# Altium PCB 105848.PcbDoc
Units mil, origin at the board's own origin, x right, y up, seen from the top; angles counter-clockwise.
Board outline 6500 x 5700 mil, 2 copper layers (Top Layer, Bottom Layer); 58 components, 65 nets, 285 pads, 65 vias.
Unrouted connection lines stored in the file: 59.
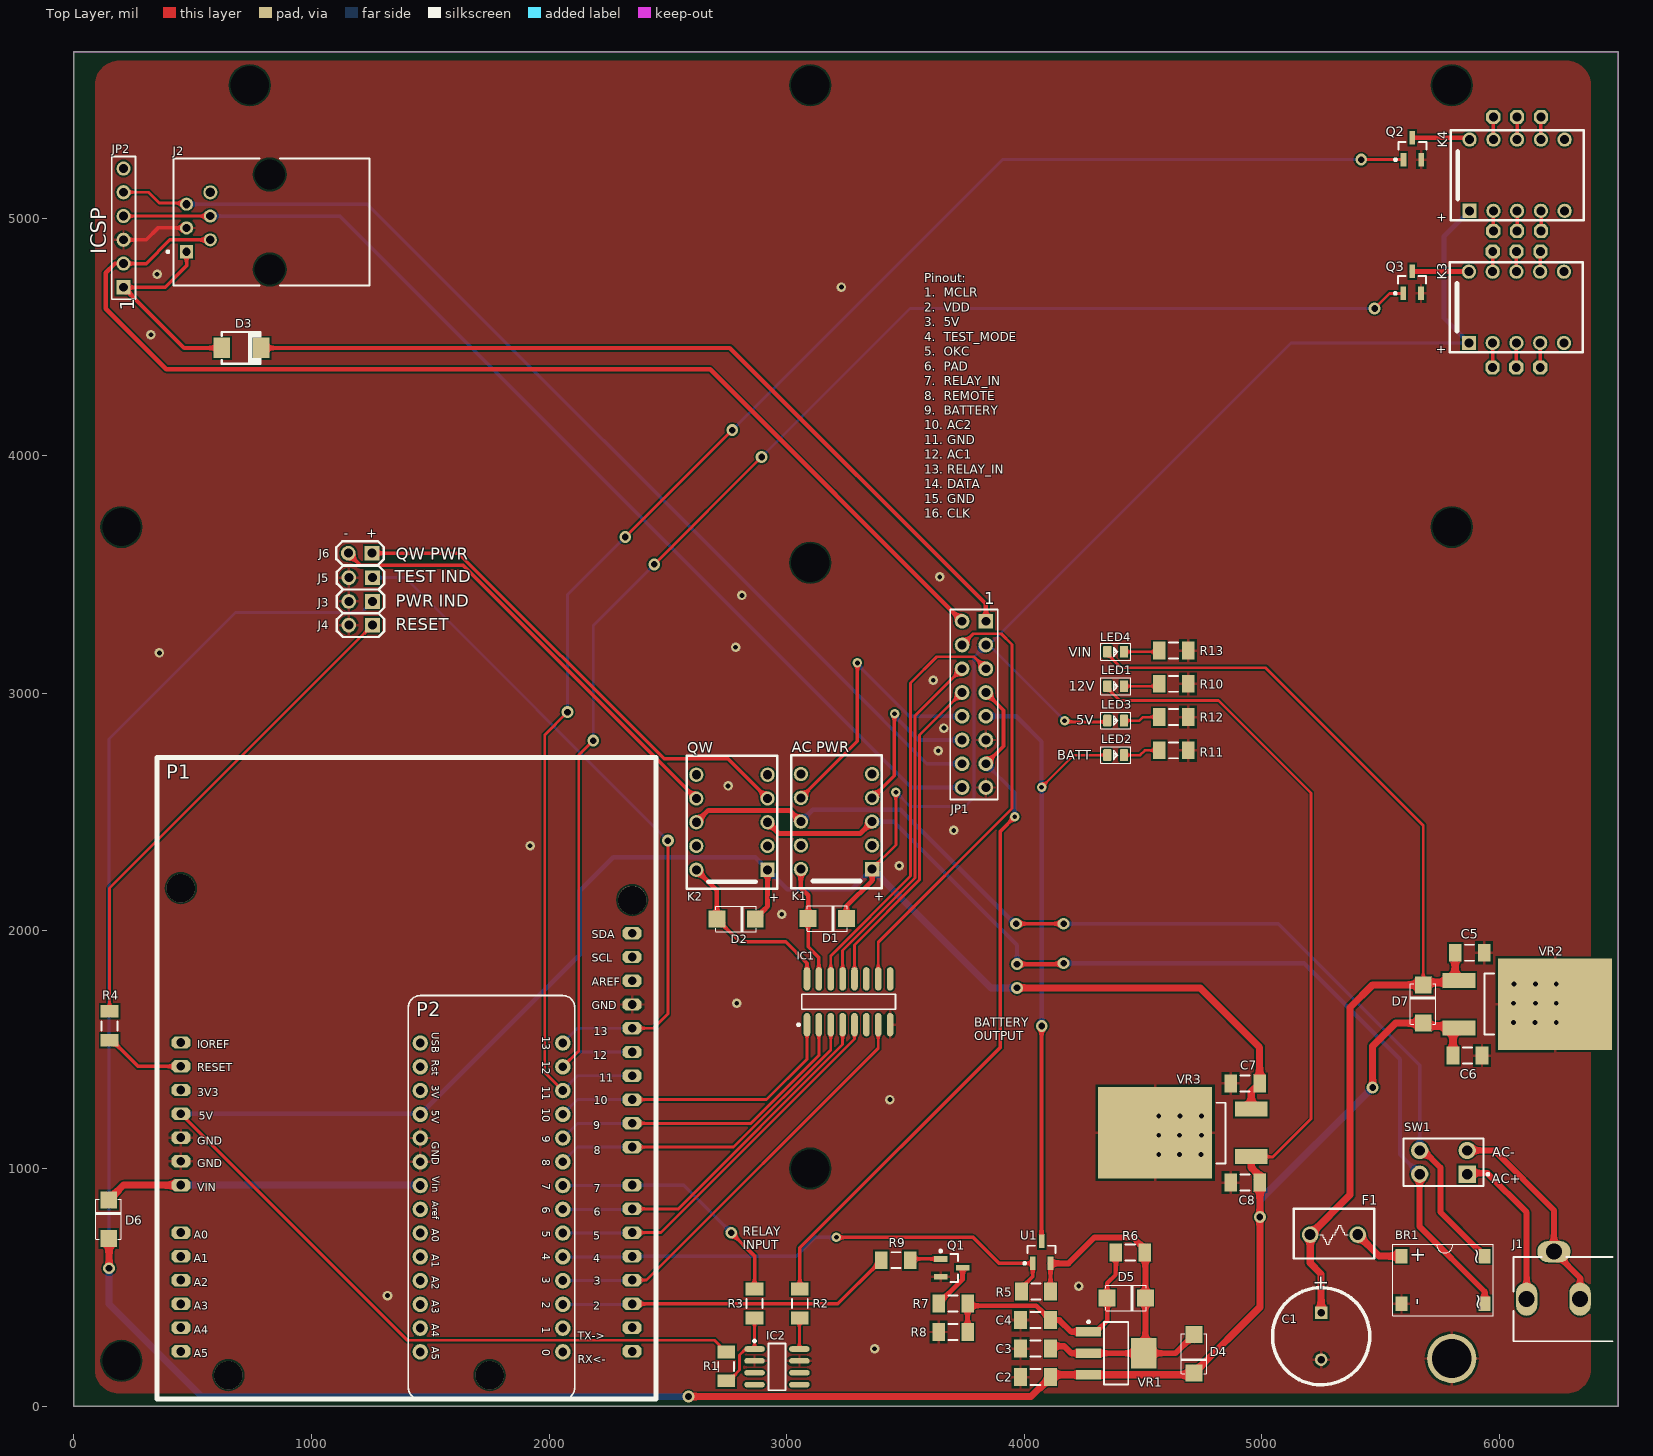
[diagram p0: Top Layer view]
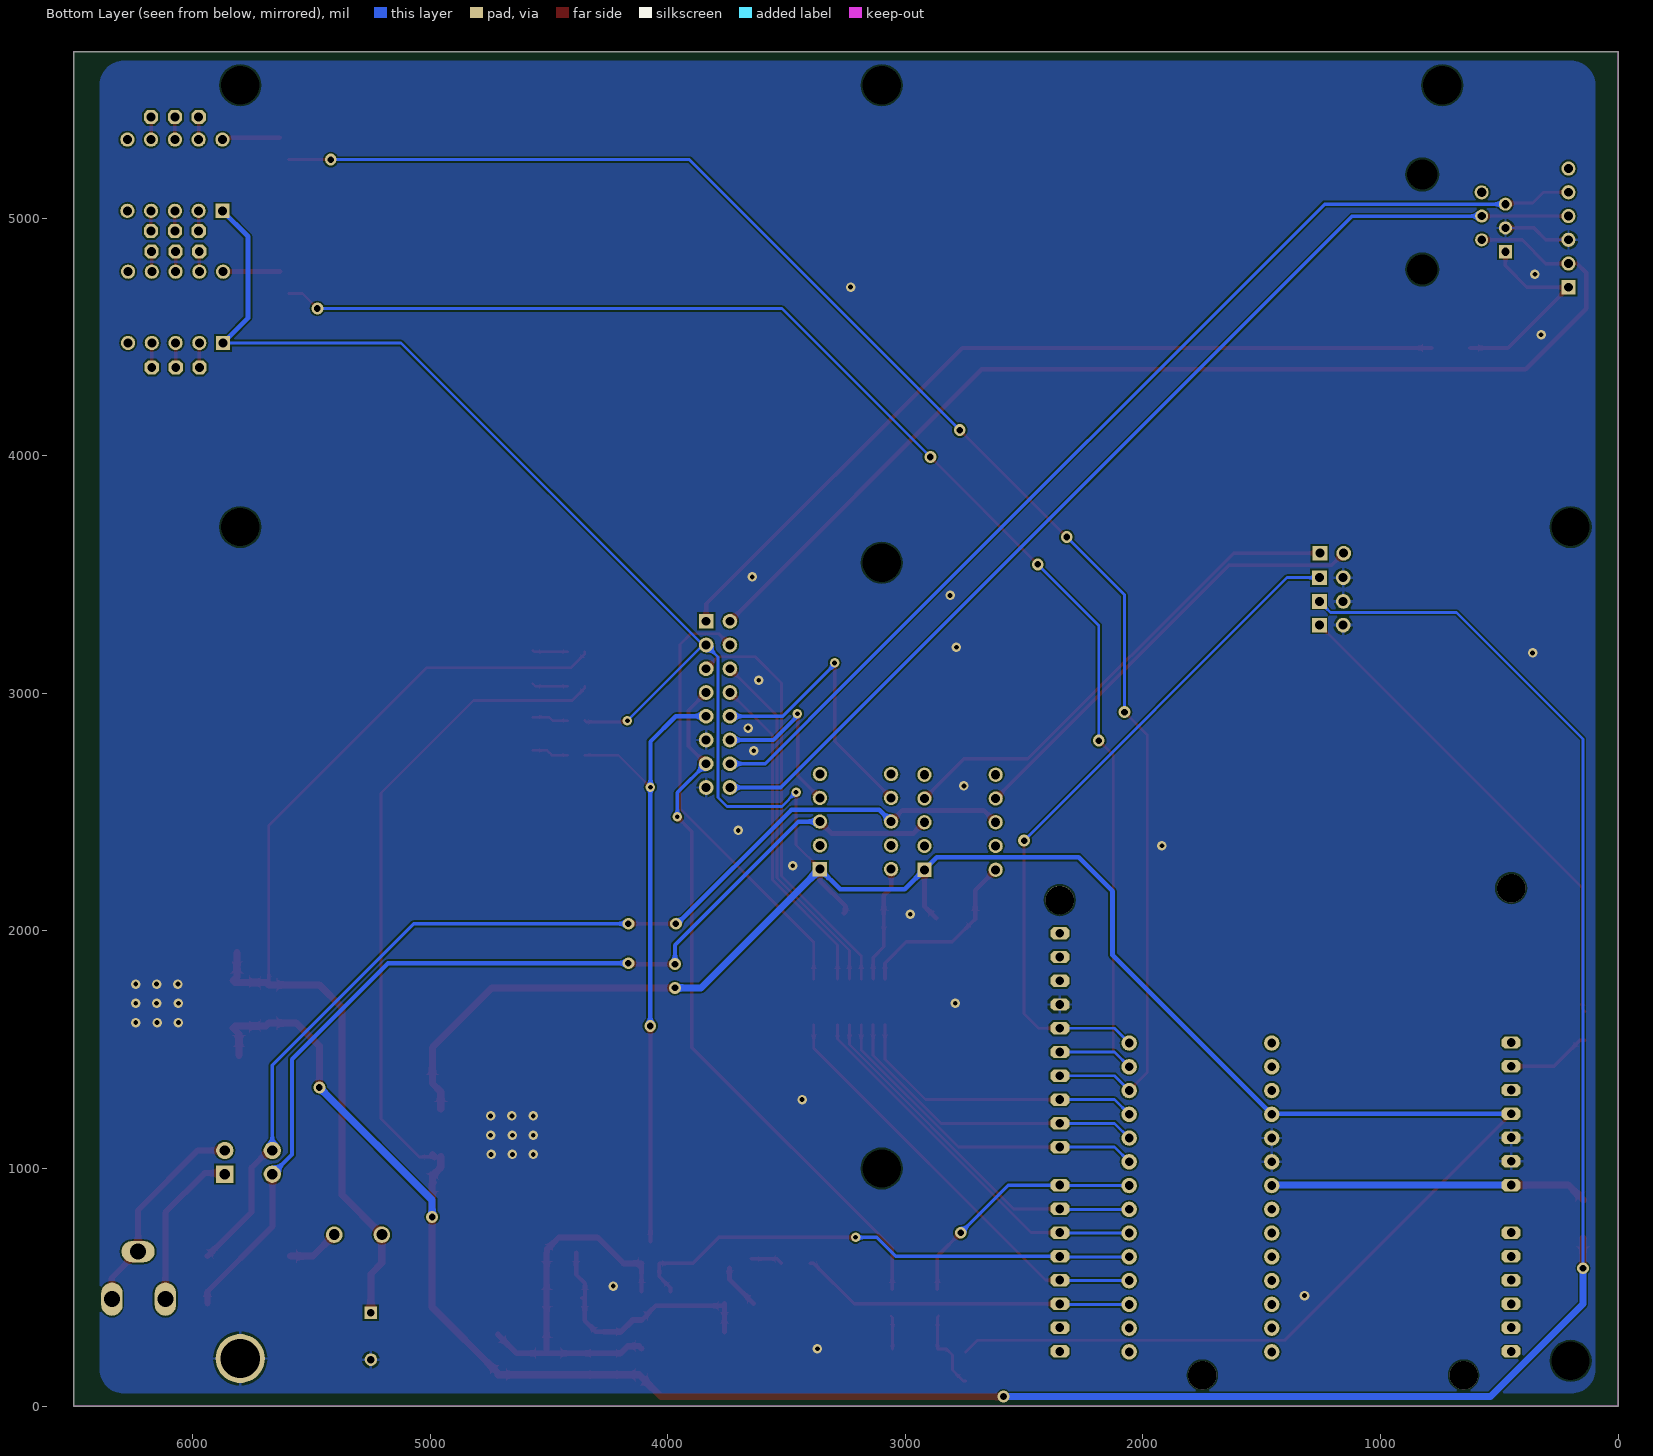
[diagram p1: Bottom Layer view, seen from below]

## Layer stack, top to bottom
Top Solder: solder mask 0.4, Solder Resist, Dk 3.5
Top Layer: signal copper 1.4
Dielectric 1: dielectric 12.6, FR-4, Dk 4.8
Bottom Layer: signal copper 1.4
Bottom Solder: solder mask 0.4, Solder Resist, Dk 3.5

## Board outline
0,0 6500,0 6500,5700 0,5700

## Design rules (kind name [scope] priority, off if disabled: settings)
BoardOutlineClearance [All] p1: gap=10 ignorepadtopadclearanceinfootprint=FALSE
Clearance [All] p1: gap=7 ignorepadtopadclearanceinfootprint=FALSE
Height [All] p1 off: minheight=0 maxheight=1000 prefheight=500
HoleSize [All] p1: absolutevalues=TRUE maxlimit=260 minlimit=10 maxpercent=80.000 minpercent=20.000
HoleToHoleClearance [All] p1: gap=7 allowstackedmicrovias=TRUE
LayerPairs [All] p1 off: enforce=TRUE
MinimumAnnularRing [All] p1: minimumring=5
MinimumSolderMaskSliver [All] p1: minsoldermaskwidth=7
PlaneClearance [All] p1: clearance=10
PolygonConnect PolygonConnect_Via [All vs IsVia] p1: connectstyle=Direct reliefconductorwidth=12 reliefentries=4 polygonreliefangle="90 Angle" airgapwidth=10
PolygonConnect [All] p2: connectstyle=Relief reliefconductorwidth=12 reliefentries=4 polygonreliefangle="90 Angle" airgapwidth=10
RoutingVias [All] p1: holewidth=20 width=40 viastyle="Through Hole" minholewidth=18 minwidth=30 maxholewidth=28 maxwidth=50
SilkToSilkClearance [All] p1 off: silktosilkclearance=10
SilkToSolderMaskClearance [IsPad] p1 off: minsilkscreentomaskgap=10 clearancetoexposedcopper=TRUE
SolderMaskExpansion [All] p1: expansion=2
UnRoutedNet [All] p1: checkbadconnections=TRUE
Width [All] p1: maxlimit=500 minlimit=7 preferedwidth=12
21 further rules are at their usual default settings.

## Components (designator, comment, footprint, x,y, rotation, side; value= is the part's Value field where it differs from the comment)
BR1 "BRIDGE_1A_SMT" BRIDGE_1A_SMT 5588,631 r90 top
C1 "Cap" CAPR5-4X5 5250,293.57 r270 top value=220uF
C2 "Cap" CAPC1206(3216)110_M 4047.76,121.68 r180 top value=0.1uF
C3 "Cap" CAPC1206(3216)110_M 4047.76,241.68 r180 top value=1uF
C4 "Cap" CAPC1206(3216)110_M 4047.76,361.68 r0 top value=1uF
C5 "Cap" RESC1206(3216)_M 5875,1908 r0 top value=0.33uF
C6 "Cap" RESC1206(3216)_M 5866,1475 r0 top value=0.1uF
C7 "Cap" RESC1206(3216)_M 4930,1358 r180 top value=0.1uF
C8 "Cap" RESC1206(3216)_M 4930,940.46 r180 top value=0.33uF
D1 "Diode 1N5400" DO-214AC 3171,2052 r0 top
D2 "Diode 1N5400" DO-214AC 2787,2050 r0 top
D3 "SS12" SMB_2 622.86,4454 r0 top
D4 "1N4002" DO-214AC 4715,220 r270 top
D5 "1N4002" DO-214AC 4429,455 r0 top
D6 "1N4002" DO-214AC 146,786 r90 top
D7 "1N4002" DO-214AC 5680,1692 r90 top
F1 "1A" FUSE_200 5404,721.17 r180 top
IC1 "ULN2003A" SO-16_M 3260.75,1701.68 r90 top locked
IC2 "ILD207" SO8_N 2959.49,165 r0 top
J1 "DC Power Jack" KLD-0202_2 6340,450 r180 top
J2 "6P MOD JACK" TECO-5520470-3_V 769.47,4984 r90 top
J3 "PWR IND" JMP2 1257,3387.02 r180 top locked
J4 "RESET" JMP2 1257,3287 r180 top locked
J5 "TEST IND" JMP2 1257,3487 r180 top locked
J6 "QW PWR" JMP2 1255,3590 r180 top locked
JP1 "8x2 Header" HDR2X8 3838.75,3303.68 r270 top
JP2 "ICSP" HDR1X6 209,4709 r90 top
K1 "AC PWR" AZ_940 3360,2260 r180 top
K2 "QW" AZ_940 2920,2257.35 r180 top
K3 "RELAY1" AZ_940 5872,4475 r90 top
K4 "RELAY2" AZ_940 5875,5031 r90 top
LED1 "12V" LED-0805 4385,3030 r0 top
LED2 "BATT" LED-0805 4385,2740 r0 top
LED3 "5V" LED-0805 4385,2885 r0 top
LED4 "VIN" LED-0805 4385,3175 r0 top
P1 "Arduino Uno" ArduinoUno 2350,1790 r0 top locked
P2 "Metro Mini 328" "Adafruit Metro Mini" 1408,1728 r270 top
Q1 "MMBT2222" SOT-23_M 3694.49,581.68 r0 top
Q2 "MOSFET P-CHANNEL" SOT-23_M 5634,5292.74 r90 top
Q3 "MOSFET P-CHANNEL" SOT-23_M 5633,4729.74 r90 top
R1 "" RESC1206(3216)_M 2745.75,166.68 r270 top value=20K
R2 "" RESC1206(3216)_M 3055.75,431.68 r270 top value=500R
R3 "" RESC1206(3216)_M 2865,431.68 r90 top value=100K
R4 "Resistor" RESC1206(3216)_M 150,1600 r270 top value=1k
R5 "" RESC1206(3216)_M 4049.72,481.68 r0 top value=20K
R6 "" RESC1206(3216)_M 4446.98,646 r180 top value=2K
R7 "" RESC1206(3216)_M 3700.75,431.68 r180 top value=2.2K
R8 "" RESC1206(3216)_M 3700.75,311.68 r180 top value=3.74K
R9 "Resistor" RESC1206(3216)_M 3460,614 r0 top value=1k
R10 "Resistor" RESC1206(3216)_M 4628.98,3040 r0 top value=2.2k
R11 "Resistor" RESC1206(3216)_M 4628.98,2760 r0 top value=1k
R12 "Resistor" RESC1206(3216)_M 4628.98,2900 r0 top value=1k
R13 "Resistor" RESC1206(3216)_M 4628.98,3180 r0 top value=2.2k
SW1 "PWR SWITCH" DPST-4 5764.87,1026 r180 top
U1 "MOSFET P-CHANNEL" SOT-23_M 4073.35,647.01 r90 top locked
VR1 "LM317DCYR" SOT223_M 4386.89,222.23 r0 top
VR2 "MC7812" D2PAK 5830,1791 r180 top
VR3 "MC7805" D2PAK 4956,1050 r0 top

## Footprints (in the part's own frame and the unit in brackets; to place one, negate y for a bottom-side part, rotate by r counter-clockwise, add the part's x,y. Pads: shape width x height; smd on the part's side, far side on the other; paste and mask are expansions set on the pad)
"Adafruit Metro Mini" [mil] "Adafruit Metro Mini 328 - 5V 16MHz"
  round 65 hole 37: 1(200,50) 2(300,50) 3(400,50) 4(500,50) 5(600,50) 6(700,50) 7(800,50) 8(900,50) 9(1000,50) 10(1100,50) 11(1200,50) 12(1300,50) 13(1400,50) 14(1500,50) 15(1500,650) 16(1400,650) 17(1300,650) 18(1200,650) 19(1100,650) 20(1000,650) 21(900,650) 22(800,650) 23(700,650) 24(600,650) 25(500,650) 26(400,650) 27(300,650) 28(200,650)
  silkscreen extent 0,0 1700,700
ArduinoUno [mil]
  oct 80x52 hole 37: 0(0,-1560) 1(0,-1460) 2(0,-1360) 3(0,-1260) 3V3(-1900,-460) 4(0,-1160) 5(0,-1060) 6(0,-960) 7(0,-860) 8(0,-700) 9(0,-600) 10(0,-500) 11(0,-400) 12(0,-300) 13(0,-200) A0(-1900,-1060) A1(-1900,-1160) A2(-1900,-1260) A3(-1900,-1360) A4(-1900,-1460) A5(-1900,-1560) AREF(0,0) GND(-1900,-760) GND1(-1900,-660) GND2(0,-100) IOREF(-1900,-260) RESET(-1900,-360) SCL(0,100) SDA(0,200) VCC(-1900,-560) VIN(-1900,-860)
  round 120 hole 120 unplated paste+0 mask+5: ""(-1900,390) ""(-1700,-1660) ""(-600,-1660) ""(0,340)
  silkscreen extent -2000,-1760 100,940
AZ_940 [mil]
  rect 60x60 hole 38: 1(0,0)
  round 60 hole 38: 2(0,-100) 3(0,-200) 4(0,-300) 5(0,-400) 6(300,-400) 7(300,-300) 8(300,-200) 9(300,-100) 10(300,0)
  silkscreen extent -40,-480 340,80
BRIDGE_1A_SMT [mil]
  rect 60x50 smd: 1(0,0) 2(-200,0) 3(-200,-350) 4(0,-350)
  silkscreen extent -250,-388 50,38
CAPC1206(3216)110_M [mm]
  rect 1.35x1.9 smd: 1(-1.6,0) 2(1.6,0)
  silkscreen extent -0.55,-0.85 0.55,0.85, body extent -1.7,-0.9 1.7,0.9, height 1.1
CAPR5-4X5 [mm] "Capacitor; 2 Leads"
  rect 1.35x1.35 hole 0.8: 1(-2.5,0)
  round 1.35 hole 0.8: 2(2.5,0)
  silkscreen extent -5.19,-5.19 5.19,5.19, body extent -5,-5 5,5, height 16.13
D2PAK [mm]
  rect 3.5x1.6 smd: 1(0,0) 3(0,5.08)
  rect 12.2x9.75 smd: 2(-10.275,2.54)
  silkscreen extent -3.75,-0.75 -2.75,5.75, body extent -9.43,-0.87 0.99,5.86, height 2.63
DO-214AC [mil]
  rect 71x70 smd: +(-80.39,0) -(81,0)
  silkscreen extent -85,-53 85,54, body extent -108,-55 108,55, height 90
DPST-4 [mm] "Switch; 4 Leads"
  rect 1.85x1.85 hole 1.1: 1(-2.54,1.27)
  round 1.85 hole 1.1: 2(-2.54,-1.27) 3(2.54,-1.27) 4(2.54,1.27)
  silkscreen extent -4.88,-2.54 4.28,2.54
FUSE_200 [mil]
  round 70 hole 46: 1(0,0) 2(200,0)
  silkscreen extent -70,-110 270,100
HDR1X6 [mil] "Connector; Header; 6 Position"
  rect 60x60 hole 37: 1(0,0)
  oval 60x59.05 hole 37: 2(100,0) 3(200,0) 4(300,0) 5(400,0) 6(500,0)
  silkscreen extent -50,-50 550,50
HDR2X8 [mil] "Connector; Header; 8x2 Position"
  rect 62x62 hole 37: 1(0,0)
  round 62 hole 37: 2(0,-100) 3(100,0) 4(100,-100) 5(200,0) 6(200,-100) 7(300,0) 8(300,-100) 9(400,0) 10(400,-100) 11(500,0) 12(500,-100) 13(600,0) 14(600,-100) 15(700,0) 16(700,-100)
  silkscreen extent -50,-150 750,50
JMP2 [mil]
  rect 62x62 hole 38: 1(0,0)
  round 62 hole 38: 2(100,0)
  silkscreen extent -50,-50 150,50
KLD-0202_2 [mil] "DC Power Jack, 2.5mm, KLD Series, PCB Mount"
  oval 90x140 hole 67: 1(225,0) 2(0,0)
  oval 140x90 hole 67: 3(110,-200)
  silkscreen extent -136,-178 280,177, body extent -344,-190 254,180, height 433
LED-0805 [mil]
  rrect25% 35x50 smd: +(-35,0) -(35,0)
  silkscreen extent -62,-35 63,35, body extent -39,-25 39,25, height 25
RESC1206(3216)_M [mm]
  rect 1.35x1.9 smd: 1(-1.55,0) 2(1.55,0)
  silkscreen extent -0.5,-0.85 0.5,0.85, body extent -1.67,-0.87 1.67,0.87, height 0.75
SMB_2 [mm]
  rect 1.75x2.18 smd: 1(0,0) 2(4.22,0)
  silkscreen extent 0,-1.7 4.22,1.7, body extent -0.62,-1.8 4.78,1.8, height 2.27
SO8_N [mm] "SOIC, 8-Leads, Body 4.9x3.9mm, Pitch 1.27mm, IPC Medium Density"
  oval 2.2x0.6 smd: 1(-2.4,1.905) 2(-2.4,0.635) 3(-2.4,-0.635) 4(-2.4,-1.905) 5(2.4,-1.905) 6(2.4,-0.635) 7(2.4,0.635) 8(2.4,1.905)
  silkscreen extent -2.52,-2.5 0.9,2.88, body extent -3,-2.5 3,2.5, height 1.75
SO-16_M [mm] "SOIC, 16-Leads, Body 9.9x3.9mm, Pitch 1.27mm, IPC Low Density"
  oval 2.5x0.7 smd: 1(-2.45,4.445) 2(-2.45,3.175) 3(-2.45,1.905) 4(-2.45,0.635) 5(-2.45,-0.635) 6(-2.45,-1.905) 7(-2.45,-3.175) 8(-2.45,-4.445) 9(2.45,-4.445) 10(2.45,-3.175) 11(2.45,-1.905) 12(2.45,-0.635) 13(2.45,0.635) 14(2.45,1.905) 15(2.45,3.175) 16(2.45,4.445)
  silkscreen extent -2.57,-5 0.8,5.47, body extent -2,-5 2,5, height 1.75
SOT223_M [mm]
  rect 2.7x1 smd: 1(-2.95,2.3) 2(-2.95,0) 3(-2.95,-2.3)
  rect 2.7x3.3 smd: 4(2.95,0)
  silkscreen extent -3.07,-3.35 1.3,3.47, body extent -1.85,-3.35 1.85,3.35, height 1.7
SOT-23_M [mm]
  rect 1.45x0.6 smd: 1(-1.175,0.95) 2(-1.175,-0.95) 3(1.175,0)
  silkscreen extent -1.3,-1.5 0.7,1.92, body extent -1.34,-1.5 1.08,1.5, height 1.1
TECO-5520470-3_V [mm]
  rect 1.4x1.4 hole 0.89: 1(-3.175,7.5)
  round 1.4 hole 0.89: 2(-1.905,4.96) 3(-0.635,7.5) 4(0.635,4.96) 5(1.905,7.5)
  round 1.5 hole 1: 6(3.175,4.96)
  round 3 hole 3.25 unplated: MH1(-5.075,-1.39) MH2(5.085,-1.39)
  silkscreen extent -6.8,-12.06 6.8,9.62, body extent -7.87,-12.06 7.87,8.9, height 16.04

## Part data
C1 C2 C3 C5 C6 C7 C8: library part CAP200, "CAP200"
C4: "Capacitor", MFR=Vishay, Power Rating=0.25W
D1: library part SMD-DIODE-SCHOTTKY-20V-1A(SOD-123), "1N5400", MPN=B5819W
D2: library part SMD-DIODE-SCHOTTKY-20V-1A(SOD-123), "IN5400", MPN=B5819W
D3: library part "D Schottky", "Schottky Diode", Code_JEDEC=DO-214-AC, ComponentLink1Description=Datasheet, ComponentLink1URL=https://www.vishay.com/docs/88746/ss12.pdf, LatestRevisionDate=17-Jul-2002, LatestRevisionNote="Re-released for DXP Platform.", PackageDescription="DO-214-AA/SMB; 2 C-Bend Leads; Body 5.3 x 3.6 mm, inc. leads (LxW)", PackageReference=SMA, Published=8-Jun-2000, Publisher="Altium Limited"
D4 D5 D6 D7: library part SMD-DIODE-SCHOTTKY-20V-1A(SOD-123), MPN=B5819W
F1: library part FUSE_200, "FUSE_200"
IC1: library part ULN2003, "ULN2003", ComponentLink1Description=Datasheet, ComponentLink1URL=https://www.diodes.com/assets/Datasheets/ULN200xA.pdf, MFR P/N=ULN2003
IC2: library part OPTO_DUAL_2, "DUAL OPTO ISOLATOR", MFR=Vishay, MFR PART=ILD207T, ComponentLink1Description=Datasheet, ComponentLink1URL=http://www.vishay.com/docs/83647/ild205t.pdf
J1: library part CONN-POWER-JACK-2.1MM(DC-005), MPN=DC-005
J2: library part "Modular Jack 6P", "6 Position Modular Jack Connector"
J3 J4 J5 J6: library part JUMPER_2, "JUMPER_2"
JP1: library part 15C_2ROW_HEADER
JP2: library part DIP-BLACK-MALE-HEADER(6P-2.54), "DIP-BLACK-MALE-HEADER(6P-2.54)", MPN=P125-1106A1BS116A1
K1 K2 K3 K4: library part Relay_1, "AZ850-5", Part Number=101671, ComponentLink1Description=Datasheet, ComponentLink1URL=http://www.azettler.com/pdfs/az850.pdf
LED1 LED2 LED3 LED4: library part SMD-LED-CLEAR-RED(0805), MPN=17-215SURC/S530-A2/TR8
P2: library part "Metro Mini", "Adafruit METRO Mini 328 rev A", MFR=Adafruit, MFR P/N=2590, ComponentLink1Description=Datasheet, ComponentLink1URL=https://github.com/adafruit/Adafruit-METRO-328-PCB/raw/master/Metro%20Mini%20Rev%20A.pdf
Q1: library part 2N3904_SMT, "NPN Bipolar Transistor", MFR="Fairchild Semi", =http://datasheet.octopart.com/MMBT2222-Fairchild-datasheet-39713.pdf, MFR P/N=MMBT2222, OriginalName=NPN
Q2 Q3: library part "P-CHANNEL MOSFET", MFR="DIODES, INC.", MPN=2N7002, =http://datasheet.octopart.com/DMG3415U-7-Diodes-Inc.-datasheet-10027536.pdf
R1 R2 R3 R4 R5 R9 R10 R11 R12 R13: library part CMP-2003-01077-1
R6 R8: library part CMP-2003-01077-1, Tolerance=1%
R7: library part CMP-2003-01077-1, Manufacturer=Vishay, Part Number=CRCW12066K04FKEA, Tolerance=1%, ComponentLink1Description=Datasheet, ComponentLink1URL=http://www.mouser.com/ds/2/427/dcrcwe3-109170.pdf
SW1: library part "Header 2x2"
U1: library part "P-CHANNEL MOSFET", MFR="DIODES, INC.", MPN=DMG3415U, =Datasheet, ComponentLink1Description=Datasheet, ComponentLink1URL=https://www.diodes.com/assets/Datasheets/ds31735.pdf
VR1: library part LM317, "Adjustable Voltage Regulator", MFR=TI, ComponentLink1Description=Datasheet, ComponentLink1URL=http://www.ti.com/general/docs/lit/getliterature.tsp?genericPartNumber=tlv1117-50&fileType=pdf, MPN=LM317DCYR
VR2: "12V Fixed Output Voltage Regulator", MFR=TI, MPN=LM317DCYR, ComponentLink1Description=Datasheet, ComponentLink1URL=http://www.ti.com/general/docs/lit/getliterature.tsp?genericPartNumber=tlv1117-50&fileType=pdf
VR3: library part MC7812, "5V Fixed Output Voltage Regulator", MFR=TI, ComponentLink1Description=Datasheet, ComponentLink1URL=http://www.ti.com/general/docs/lit/getliterature.tsp?genericPartNumber=tlv1117-50&fileType=pdf, MPN=MC7805
BR1: ComponentField7="Published 8-Jun-2000"

## Free pads (board coordinates)
  round 0 hole 161.42 unplated: 0(200,190) 0(200,3700) 0(740,5560) 0(3100,1000) 0(3100,3550) 0(3100,5560) 0(5800,3700) 0(5800,5560)
  oct 60x60 hole 37: 2(5971,4372) 2(5972,4860) 2(5975,4946) 2(5975,5426) 3(6071,4372) 3(6072,4860) 3(6075,4946) 3(6075,5426) 4(6172,4372) 4(6173,4860) 4(6176,4946) 4(6176,5426)
  round 206.69 hole 165.35: MH6(5800,200)

## Via types
v1: diameter 40, hole 20, Top Layer to Bottom Layer, tented both sides, 27 vias
v2: diameter 40, hole 20, Top Layer to Bottom Layer, tented bottom, 18 vias
v3: diameter 50, hole 28, Top Layer to Bottom Layer, tented both sides, 17 vias
v4: diameter 50, hole 28, Top Layer to Bottom Layer, tented bottom, 3 vias

## Nets (pads, with @x,y where several pads share a name; then routed paths per layer and width w, separated by ;. In a path a pad name is that pad's centre, name@x,y a point inside that pad or via, vN(x,y) a via of type N, cw(c..) or ccw(c..) an arc to the next point about the centre after c; other vN are vias at no path point)
5V: C7.1 D1.- D2.- JP1.3 K1.1 K2.1 K3.1 K4.1 LED3.+ P1.VCC P2.4 R1.1 VR3.3 | length 14237.3
  Top Layer w12: P1.VCC 1403,277 2696.45,277 R1.1 ; K1.1 3360,2262 3460,2362 v1(3460,2584) ; v1(4170,2885) 4175,2880 4345,2880 LED3.+
  Top Layer w20: D2.-@2870,2054 2920,2104 K2.1 ; D1.-@3258,2075 3252,2081 3252,2104 3360,2212 K1.1
  Top Layer w30: v3@3970,1750 v3(3970,1760) 4741,1760 4991.02,1509.98 C7.1 4956,1322.98 VR3.3
  Bottom Layer w12: v1(3460,2584) 3520,2524 3751,2524 3788.43,2561.43 3788.43,3153.35 JP1.3 JP1.3@3851.32,3203.68 ; v1(4170,2885) JP1.3@3851.32,3203.68 ; K3.1 5122.65,4475 JP1.3@3851.32,3203.68
  Bottom Layer w20: P1.VCC 1456,1230 P2.4 2128,1898 2128,2167 2271,2310 2867.35,2310 K2.1 3002.35,2175 3275,2175 K1.1 ; K3.1 5767,4580 5767,4923 K4.1
  Bottom Layer w30: K1.1 3860,1760 v3(3970,1760)
12V: C2.1 C6.1 C8.1 D4.- D6.+ D7.+ J3.1 LED1.+ VR1.3 VR2.3 VR3.1 | length 13846.6
  Top Layer w12: LED1.+ 4350,3022 4402,2970 4818,2970 5208,2580 5208,1209 5048,1049 VR3.1@4981.97,1049
  Top Layer w30: D6.+ 148,707.61 v4(148,580) ; v3(2587,40) 4029.07,40 C2.1 4120.75,131.68 VR1.3 D4.-@4715,131.68 ; D4.- 4992,416 v3(4992,796) 4992,934.46 C8.1@4986,940.46 ; VR3.1 4956,1004 4991.02,968.98 C8.1 ; VR3.1@4981.97,1049 VR3.1@4991.02,1058.06 ; v3(5467,1341) 5467,1516 5562.61,1611.61 D7.+ 5691.61,1600 5821,1600 VR2.3 5804.98,1565.98 C6.1
  Bottom Layer w12: v4(148,580) 148,2808 680,3340 1209.98,3340 J3.1
  Bottom Layer w30: v4(148,580) 148,429 537,40 v3(2587,40) ; v3(4992,796) 4992,866 v3(5467,1341)
_OKC: IC1.3 P1.8 P2.23 | length 1429.1
  Top Layer w12: P1.8 2776.87,1090 3185.75,1498.88 IC1.3
  Bottom Layer w12: P2.23 2120,1090 P1.8
_PAD: IC1.4 P1.6 P2.21 | length 1548.4
  Top Layer w12: P1.6 2543.74,830 3235.75,1522.01 IC1.4
  Bottom Layer w12: P2.21 2348,828 P1.6
_REMOTE: IC1.5 P1.5 P2.20 | length 1626.3
  Top Layer w12: P1.5 2470.61,730 3285.75,1545.14 IC1.5
  Bottom Layer w12: P2.20 2348,728 P1.5
_TEST_MODE: IC1.7 P1.3 P2.18 | length 1832.2
  Top Layer w12: P1.3 2410,530 3385.75,1505.75 IC1.7
  Bottom Layer w12: P2.18 2348,528 P1.3
AC+: BR1.3 K1.3 K2.3 SW1.4 | length 4360
  Top Layer w18: v3(3970,1860) 4162,1860 v3(4166,1864) ; SW1.4@5648,976 SW1.4
  Top Layer w20: K2.3 2967.35,2410 3310,2410 K1.3
  Top Layer w25: SW1.4 5664.87,755.13 5938,482 BR1.3
  Bottom Layer w18: K1.3 3450,2460 3970,1940 v3(3970,1860) ; v3(4166,1864) 5178,1864 5582,1460 5582,1058.87 SW1.4
AC-: BR1.4 K1.8 K2.8 SW1.3 | length 4500.1
  Top Layer w15: v3(3966.32,2030) v3(4166,2030)
  Top Layer w18: SW1.3@5642,1076 SW1.3
  Top Layer w20: K2.8 2670,2507.35 3012.65,2507.35 K1.8
  Top Layer w25: SW1.3 5680,1076 5752,1004 5752,817 BR1.4
  Bottom Layer w15: v3(4166,2030) 5070,2030 5664.87,1435.13 SW1.3
  Bottom Layer w18: K1.8 3110,2510 3480,2510 3960,2030 v3(3966.32,2030)
AC_OUT+: JP1.12 K1.4 | length 733.8
  Top Layer w15: K1.4 3453.44,2653.44 3453.44,2914.44 v1(3454.44,2914.44)
  Bottom Layer w15: v1(3454.44,2914.44) 3454.44,2913.44 3450,2909 3555.32,2803.68 JP1.12
AC_OUT-: JP1.10 K1.7 | length 1203.8
  Top Layer w15: K1.7 3298,2798 v1(3298,3128)
  Bottom Layer w15: v1(3298,3128) 3298,3122 3516.32,2903.68 JP1.10
BATT_EN: P1.4 P2.19 R5.1 U1.1 | length 2195.8
  Top Layer w15: v1(3210,710) 3784.8,710 3894.05,600.75 U1.1 4035.94,544.94 3988.7,497.7 R5.1
  Bottom Layer w12: P2.19 2348,628 P1.4
  Bottom Layer w15: P1.4 3040,630 3120,710 v1(3210,710)
BATT_OUT: JP1.9 LED2.+ U1.3 | length 2718.7
  Top Layer w10: v1(4073.35,2605) 4208.35,2740 LED2.+
  Top Layer w18: U1.3 4073.35,1599.35 v4(4074,1600)
  Bottom Layer w18: JP1.9 3966.32,2903.68 4073.35,2796.65 v1(4073.35,2605) 4078,2600.35 4074,2596.35 v4(4074,1600)
GND: BR1.2 C1.2 C2.2 C3.2 C4.1 C5.2 C6.2 C7.2 C8.2 IC1.8 IC2.2 IC2.7 J2.3 J3.2 J4.2 J5.2 JP1.11 JP1.15 JP2.3 P1.GND P1.GND1 P1.GND2 P2.5 P2.6 pad.MH6 Q1.2 Q2.2 Q3.2 R8.2 R10.2 R11.2 R12.2 R13.2 VR2.2 VR3.2 | length 285.9
  Top Layer w15: JP2.3 304,4909 354,4959 J2.3
  other v1: 3370,240.96 1320,465 4230,505 3435,1290 2790,1695 2980,2070 3474,2274 1920,2358 3704,2423 2753.35,2610 3638,2758 3662,2854 3617.07,3055 360,3170 2785,3193.76 2812,3412 3645,3490 324,4509 3230.75,4710 349.82,4764
  other v2: 4566,1059 4654,1059 4744,1059 4566,1140 4654,1140 4746,1140 4566,1221 4656,1221 4746,1221 6060,1614 6150,1614 6240,1614 6060,1695 6152,1695 6240,1695 6062,1776 6152,1776 6240,1776
LOW_BATT_EN: P1.2 P2.17 R9.1 | length 1413.7
  Top Layer w15: P1.2 3214.98,430 3386.65,601.68 R9.1@3399.72,601.68
  Bottom Layer w12: P2.17 2348,428 P1.2
MCLR: D3.2 JP1.1 | length 3572.7
  Top Layer w18: D3.2@785,4454 2761,4454 3838.75,3376.25 JP1.1
NetBR1_1: BR1.1 F1.1 | length 221.3
  Top Layer w30: F1.1 5494.17,631 BR1.1
NetC4_2: C4.2 D5.+ R6.2 R7.1 R8.1 VR1.1 | length 1088.5
  Top Layer w15: R7.1 R7.1@3771.45,422
  Top Layer w18: VR1.1 VR1.1@4302.78,312.78 ; D5.+ 4348.61,516.88 4385.95,554.23 R6.2 ; D5.+@4350,455 D5.+@4360,455
  Top Layer w20: R8.1 R7.1 ; R7.1@3771.45,422 4050.43,422 C4.2 ; VR1.1@4302.78,312.78 4350,360 D5.+@4350,455
  Top Layer w25: C4.2 4148.32,361.68 4197.22,312.78 VR1.1
NetD1_+: D1.+ IC1.15 K1.10 | length 493.2
  Top Layer w15: D1.+@3090.61,2069 3090.61,1933.14 3135.75,1888 IC1.15
  Top Layer w20: K1.10 3060,2180 3090.61,2149.39 D1.+@3090.61,2069
NetD2_+: D2.+ IC1.16 K2.10 | length 765.2
  Top Layer w15: D2.+ 2802.61,1954 2996,1954 3085.75,1864.25 IC1.16
  Top Layer w20: K2.10 2706,2171.35 D2.+@2706,2050
NetD3_1: D3.1 J2.1 JP2.1 | length 881.8
  Top Layer w15: JP2.1 384,4709 474.2,4799.2 J2.1
  Top Layer w18: JP2.1 464,4454 D3.1
NetD6_-: D6.- P1.VIN P2.7 | length 1338.9
  Top Layer w30: D6.- 209,930 P1.VIN
  Bottom Layer w30: P1.VIN 1456,930 P2.7
NetIC2_1: IC2.1 R1.2 R3.1 | length 353.4
  Top Layer w12: R1.2 2756.65,105.65 2802,151 2802,215 2827,240 IC2.1 R3.1 2865,373.98 R3.1@2860,378.98
NetIC2_8: IC2.8 R2.2 | length 141.8
  Top Layer w12: IC2.8 3053.98,372.2 R2.2@3060.75,378.98
NetJ1_+: J1.1 SW1.1 | length 679.3
  Top Layer w25: SW1.1@5869.43,980.57 5949.77,980.57 6115,815.34 J1.1
NetJ1_-1: J1.2 J1.3 SW1.2 | length 889.1
  Top Layer w25: SW1.2 5978,1076 6230,824 J1.3 6340,540 J1.2
NetJ4_1: J4.1 R4.1 | length 2088.7
  Top Layer w12: R4.1@140,1661.02 150,1671.02 150,2180 J4.1
NetK3_10: K3.10 Q3.3 | length 239.4
  Top Layer w20: Q3.3 5871,4776 K3.10
NetK4_10: K4.10 Q2.3 | length 244.3
  Top Layer w20: Q2.3 5867,5339 K4.10
NetLED1_-: LED1.- R10.1 | length 152.1
  Top Layer w10: LED1.- 4557.95,3030 R10.1
NetLED2_-: LED2.- R11.1 | length 156.2
  Top Layer w10: LED2.- 4488,2740 4508,2760 R11.1
NetLED3_-: LED3.- R12.1 | length 154.2
  Top Layer w10: LED3.- 4485,2885 4500,2900 R12.1
NetLED4_-: LED4.- R13.1 | length 150
  Top Layer w10: LED4.- 4562.95,3175 R13.1
NetQ1_1: Q1.1 R9.2 | length 133.7
  Top Layer w15: R9.2@3521.77,601.68 3539.17,619.08 Q1.1
NetQ1_3: Q1.3 R7.2 | length 191.8
  Top Layer w20: R7.2 3740.75,532.7 Q1.3
OKC: IC1.14 JP1.5 | length 1768.2
  Top Layer w12: IC1.14 3185.75,1895 3522,2231.25 3522,3043.86 3632.14,3154 3788.43,3154 JP1.5
PAD: IC1.13 JP1.6 | length 1513.9
  Top Layer w12: IC1.13 3235.75,1917.62 3541,2222.87 3541,2905.93 JP1.6
PGC: J2.4 JP1.16 JP2.4 | length 4538.5
  Top Layer w12: JP2.4 J2.4
  Bottom Layer w15: J2.4 1119,5009 1664,4464 2829,3299 3524.32,2603.68 JP1.16 JP1.16@3747.54,2612.46
PGD: J2.5 JP1.14 JP2.5 | length 4528.9
  Top Layer w12: JP2.5 314,5109 359.2,5063.8 J2.5@479,5063.8
  Bottom Layer w15: J2.5 1235,5059 3218.9,3075.1 3590.32,2703.68 JP1.14
PWR_RELAY: IC1.2 P1.9 P2.24 | length 1350.7
  Top Layer w12: P1.9 2849,1190 3135.75,1476.75 IC1.2
  Bottom Layer w12: P2.24 2120,1190 P1.9
QW_PWR+: J6.1 K2.4 | length 2092.7
  Top Layer w15: J6.1 1618.47,3590 2484.47,2724 2753.35,2724 K2.4
QW_PWR-: J6.2 K2.7 | length 1892.7
  Top Layer w15: J6.2 1205,3540 1637.35,3540 K2.7
QW_RELAY: IC1.1 P1.10 P2.25 | length 1269.2
  Top Layer w12: P1.10 2916,1290 3085.75,1459.75 IC1.1
  Bottom Layer w12: P2.25 2120,1290 P1.10
R\E\S\E\T\: P1.RESET R4.2 | length 355.1
  Top Layer w15: R4.2@140,1538.98 160.91,1538.98 269.88,1430 P1.RESET
RELAY: P1.7 P2.22 R3.2 | length 1070.2
  Top Layer w15: v4(2767,729.43) 2865,631.43 R3.2
  Bottom Layer w12: P2.22 2348,928 P1.7
  Bottom Layer w15: P1.7 2566.43,930 v4(2767,729.43)
RELAY_IN: JP1.7 JP1.13 R2.1 | length 2997.3
  Top Layer w15: R2.1 3055.75,665.75 3900,1510 3900,2420 v1(3960,2480) ; JP1.13 3913,2777.93 3913,2929.43 JP1.7
  Bottom Layer w15: JP1.13 3960,2582.43 v1(3960,2480)
REMOTE: IC1.12 JP1.8 | length 1393.2
  Top Layer w12: IC1.12 3285.75,1940.75 3560,2215 3560,2824.93 JP1.8
RLY1: P1.12 P2.27 Q3.1 | length 6217.2
  Top Layer w12: P2.27 2125,1495 2125,2740 v3(2186,2801) ; v3(2443,3543) v3(2895,3995) ; v3(5475,4620) 5538.48,4683.48 Q3.1
  Bottom Layer w12: P2.27 2120,1490 P1.12 ; v3(2186,2801) 2186,3286 v3(2443,3543) ; v3(2895,3995) 3520,4620 v3(5475,4620)
RLY1_COM: K3.8 pad.3@6072,4860 | length 85
  Top Layer w15: K3.8 pad.3@6072,4860
RLY1_COM2: K3.2 pad.2@5971,4372 | length 103.4
  Top Layer w15: pad.2@5971,4372 5972,4373 K3.2
RLY1_NC: K3.7 pad.4@6173,4860 | length 85.2
  Top Layer w15: K3.7 6172,4857 pad.4@6173,4860
RLY1_NC2: K3.4 pad.4@6172,4372 | length 103
  Top Layer w15: pad.4@6172,4372 K3.4
RLY1_NO: K3.9 pad.2@5972,4860 | length 85
  Top Layer w15: K3.9 pad.2@5972,4860
RLY1_NO2: K3.3 pad.3@6071,4372 | length 103.4
  Top Layer w15: pad.3@6071,4372 6072,4373 K3.3
RLY2: P1.11 P2.26 Q2.1 | length 6753.1
  Top Layer w12: P2.26 1982,1404 1982,2825 v3(2078,2921) ; v3(2321,3658) v3(2771,4108) ; v3(5419,5246.48) Q2.1
  Bottom Layer w12: P2.26 2120,1390 P1.11 ; v3(2078,2921) 2078,3415 v3(2321,3658) ; v3(2771,4108) 3909.48,5246.48 v3(5419,5246.48)
RLY2_COM: K4.3 pad.3@6075,4946 | length 85
  Top Layer w15: pad.3@6075,4946 K4.3
RLY2_COM1: K4.8 pad.3@6075,5426 | length 95
  Top Layer w15: K4.8 pad.3@6075,5426
RLY2_NC: K4.4 pad.4@6176,4946 | length 85.4
  Top Layer w15: K4.4 6176,5030 pad.4@6176,4946
RLY2_NC2: K4.7 pad.4@6176,5426 | length 95.4
  Top Layer w15: K4.7 6175,5425 pad.4@6176,5426
RLY2_NO: K4.2 pad.2@5975,4946 | length 85
  Top Layer w15: pad.2@5975,4946 K4.2
RLY2_NO2: K4.9 pad.2@5975,5426 | length 95
  Top Layer w15: K4.9 pad.2@5975,5426
TEST_IND: J5.1 P1.13 P2.28 | length 2924.1
  Top Layer w12: P1.13 2440,1590 2500,1650 v3(2500,2380)
  Bottom Layer w12: J5.1 1393,3487 v3(2500,2380) ; P2.28 2120,1590 P1.13
TEST_MODE: IC1.10 JP1.4 | length 1888.8
  Top Layer w12: IC1.10 3385.75,1952.42 3949,2515.67 3949,3205 3903.32,3250.68 3785.75,3250.68 JP1.4
VADJ: C3.1 D4.+ D5.- R5.2 R6.1 U1.2 VR1.2 VR1.4 | length 1677.2
  Top Layer w17: R5.2 U1.2
  Top Layer w25: C3.1 4121.07,252 4168,252 4197.77,222.23 VR1.2 VR1.4 ; U1.2 4186.75,600.75 4296,710 4458.3,710 4508,660.3 R6.1 4510,644 D5.- 4510,229.2 VR1.4 ; D4.+ 4636.83,222.23 VR1.4
VDD: J2.2 JP1.2 JP2.2 | length 4798.7
  Top Layer w15: JP2.2 304,4809 404,4909 J2.2
  Top Layer w18: JP2.2 172.72,4809 134,4770.28 134,4618.64 388.64,4364 398.64,4364 2678.42,4364 JP1.2
VIN: C1.1 C5.1 D7.- F1.2 LED4.+ VR2.1 | length 4312.1
  Top Layer w12: LED4.+ 4350,3166 4408,3108 5016,3108 5680,2444 D7.-
  Top Layer w30: C1.1 5250,556 5204,602 F1.2 5372,889.17 5372,1678 5467,1773 D7.- 5690,1783 5822,1783 VR2.1 5813.98,1807.02 C5.1
pads on no net: IC1.6 IC1.9 IC1.11 IC2.3 IC2.4 IC2.5 IC2.6 J2.6 J2.MH1 J2.MH2 JP2.6 K1.2 K1.5 K1.6 K1.9 K2.2 K2.5 K2.6 K2.9 K3.5 K3.6 K4.5 K4.6 P1. P1.0 P1.1 P1.3V3 P1.A0 P1.A1 P1.A2 P1.A3 P1.A4 P1.A5 P1.AREF P1.IOREF P1.SCL P1.SDA P2.1 P2.2 P2.3 P2.8 P2.9 P2.10 P2.11 P2.12 P2.13 P2.14 P2.15 P2.16

## Polygon pours and split planes (outlines as drawn)
GND on Top Layer "GND_L01_P006" (solid, remove dead copper, pour order 6): 89,3344 89,154 ccw(c189,154) 189,54 6284,54 ccw(c6284,154) 6384,154 6384,5562 ccw(c6284,5562) 6284,5662 190,5662 ccw(c190,5562) 90,5562 90,5350
GND on Bottom Layer "GND_L02_P008" (solid, remove dead copper, pour order 8): 96,3344 96,154 ccw(c196,154) 196,54 6291,54 ccw(c6291,154) 6391,154 6391,5562 ccw(c6291,5562) 6291,5662 197,5662 ccw(c197,5562) 97,5562 97,5350

## Keep-outs
Keep-Out Layer:
  the board outline again, w5

## Silkscreen, mask and mechanical layers (free items; w line width, h text height)
Top Overlay:
  text "ICSP" at 137,4848 h65 r90
  text "1" at 254,4610 h60 r90
  text "Pinout: / 1.  MCLR / 2.  VDD / 3.  5V / 4.  TEST_MODE / 5.  OKC / 6.  PAD / 7.  RELAY_IN / 8.  REMOTE / 9.  BATTERY / 10. AC2 / 11. GND / 12. AC1 / 13. RELAY_IN / 14. DATA / 15. GND / 16. CLK" at 3580,3726 h62
  text "-" at 1135,3655 h40
  text "+" at 1230,3655 h40
  text "BATTERY / OUTPUT" at 3790,1540 h37
  text "AC-" at 5970,1050 h40
  text "AC+" at 5968,937.24 h40
  text "RELAY / INPUT" at 2815.21,661 h37
  text "~" at 5932,592 h65 r90
  text "~" at 5939,401 h65 r90
Drill Drawing:
  drawing of 1890 lines, arcs and shapes, not listed
  text "Symbol" at 7516.69,5902.69 h120.53
  text "Count" at 8342,5902.69 h120.53
  text "Hole Size" at 9332.7,5902.69 h120.53
  text "Plated" at 11243.86,5902.69 h120.53
  text "Hole Type" at 12069.17,5902.69 h120.53
  text "Via/Pad" at 13276.05,5902.69 h120.53
  text "Hole Tolerance" at 14241.93,5902.69 h120.53
  text "1" at 8342,5651.58 h100.45
  text "39.37mil (1.000mm)" at 9332.7,5651.58 h100.45
  text "PTH" at 11243.86,5651.58 h100.45
  text "Round" at 12069.17,5651.58 h100.45
  text "Pad" at 13276.05,5651.58 h100.45
  text "+/-3.00mil" at 14241.93,5651.58 h100.45
  text "L" at 7472.63,5641.6 h111.61
  text "1" at 8342,5400.47 h100.45
  text "165.35mil (4.200mm)" at 9332.7,5400.47 h100.45
  text "PTH" at 11243.86,5400.47 h100.45
  text "Round" at 12069.17,5400.47 h100.45
  text "Pad" at 13276.05,5400.47 h100.45
  text "+/-3.00mil" at 14241.93,5400.47 h100.45
  text "H" at 7472.63,5390.49 h111.61
  text "2" at 8342,5149.36 h100.45
  text "31.50mil (0.800mm)" at 9332.7,5149.36 h100.45
  text "PTH" at 11243.86,5149.36 h100.45
  text "Round" at 12069.17,5149.36 h100.45
  text "Pad" at 13276.05,5149.36 h100.45
  text "+/-3.00mil" at 14241.93,5149.36 h100.45
  text "A" at 7472.63,5139.37 h111.61
  text "2" at 8342,4898.24 h100.45
  text "46.00mil (1.168mm)" at 9332.7,4898.24 h100.45
  text "PTH" at 11243.86,4898.24 h100.45
  text "Round" at 12069.17,4898.24 h100.45
  text "Pad" at 13276.05,4898.24 h100.45
  text "+/-3.00mil" at 14241.93,4898.24 h100.45
  text "2" at 8342,4647.13 h100.45
  text "127.95mil (3.250mm)" at 9332.7,4647.13 h100.45
  text "NPTH" at 11243.86,4647.13 h100.45
  text "Round" at 12069.17,4647.13 h100.45
  text "Pad" at 13276.05,4647.13 h100.45
  text "+/-3.00mil" at 14241.93,4647.13 h100.45
  text "M" at 7472.63,4637.15 h111.61
  text "3" at 8342,4396.02 h100.45
  text "67.00mil (1.702mm)" at 9332.7,4396.02 h100.45
  text "PTH" at 11243.86,4396.02 h100.45
  text "Round" at 12069.17,4396.02 h100.45
  text "Pad" at 13276.05,4396.02 h100.45
  text "+/-3.00mil" at 14241.93,4396.02 h100.45
  text "F" at 7472.63,4386.04 h111.61
  text "4" at 8342,4144.9 h100.45
  text "43.31mil (1.100mm)" at 9332.7,4144.9 h100.45
  text "PTH" at 11243.86,4144.9 h100.45
  text "Round" at 12069.17,4144.9 h100.45
  text "Pad" at 13276.05,4144.9 h100.45
  text "+/-3.00mil" at 14241.93,4144.9 h100.45
  text "I" at 7491.22,4134.92 h111.61
  text "4" at 8342,3893.79 h100.45
  text "120.00mil (3.048mm)" at 9332.7,3893.79 h100.45
  text "NPTH" at 11243.86,3893.79 h100.45
  text "Round" at 12069.17,3893.79 h100.45
  text "Pad" at 13276.05,3893.79 h100.45
  text "+/-3.00mil" at 14241.93,3893.79 h100.45
  text "5" at 8342,3642.68 h100.45
  text "35.04mil (0.890mm)" at 9332.7,3642.68 h100.45
  text "PTH" at 11243.86,3642.68 h100.45
  text "Round" at 12069.17,3642.68 h100.45
  text "Pad" at 13276.05,3642.68 h100.45
  text "+/-3.00mil" at 14241.93,3642.68 h100.45
  text "K" at 7472.63,3632.7 h111.61
  text "8" at 8342,3391.57 h100.45
  text "28.00mil (0.711mm)" at 9332.7,3391.57 h100.45
  text "PTH" at 11243.86,3391.57 h100.45
  text "Round" at 12069.17,3391.57 h100.45
  text "Via" at 13276.05,3391.57 h100.45
  text "8" at 8342,3140.45 h100.45
  text "161.42mil (4.100mm)" at 9332.7,3140.45 h100.45
  text "NPTH" at 11243.86,3140.45 h100.45
  text "Round" at 12069.17,3140.45 h100.45
  text "Pad" at 13276.05,3140.45 h100.45
  text "+/-3.00mil" at 14241.93,3140.45 h100.45
  text "G" at 7472.63,3130.47 h111.61
  text "12" at 8342,2889.34 h100.45
  text "28.00mil (0.711mm)" at 9332.7,2889.34 h100.45
  text "PTH" at 11243.86,2889.34 h100.45
  text "Round" at 12069.17,2889.34 h100.45
  text "Via" at 13276.05,2889.34 h100.45
  text "+/-3.00mil" at 14241.93,2889.34 h100.45
  text "O" at 7472.63,2879.36 h111.61
  text "20" at 8342,2638.23 h100.45
  text "38.00mil (0.965mm)" at 9332.7,2638.23 h100.45
  text "PTH" at 11243.86,2638.23 h100.45
  text "Round" at 12069.17,2638.23 h100.45
  text "Pad" at 13276.05,2638.23 h100.45
  text "28" at 8342,2387.11 h100.45
  text "38.00mil (0.965mm)" at 9332.7,2387.11 h100.45
  text "PTH" at 11243.86,2387.11 h100.45
  text "Round" at 12069.17,2387.11 h100.45
  text "Pad" at 13276.05,2387.11 h100.45
  text "+/-3.00mil" at 14241.93,2387.11 h100.45
  text "B" at 7472.63,2377.13 h111.61
  text "45" at 8342,2136 h100.45
  text "20.00mil (0.508mm)" at 9332.7,2136 h100.45
  text "PTH" at 11243.86,2136 h100.45
  text "Round" at 12069.17,2136 h100.45
  text "Via" at 13276.05,2136 h100.45
  text "+/-3.00mil" at 14241.93,2136 h100.45
  text "N" at 7472.63,2126.02 h111.61
  text "93" at 8342,1884.89 h100.45
  text "37.00mil (0.940mm)" at 9332.7,1884.89 h100.45
  text "PTH" at 11243.86,1884.89 h100.45
  text "Round" at 12069.17,1884.89 h100.45
  text "Pad" at 13276.05,1884.89 h100.45
  text "+/-3.00mil" at 14241.93,1884.89 h100.45
  text "C" at 7472.63,1874.91 h111.61
  text "238 Total" at 8342,1633.77 h100.45
  text "ENGINEER:" at 8810,1286.23 h45
  text "TITLE:" at 10310,1286.23 h45
  text "DMH" at 8865,1167.23 h70
  text "Tester Control Board" at 10720,1041.23 h150
  text "PCB DESIGNER:" at 8810,991.23 h45
  text "DMH" at 8865,862.23 h70
  text "Daniel Hahaj" at 7413,694 h75
  text "DATE:" at 8810,686.23 h45
  text "PART NO.:" at 10310,686.23 h45
  text "REV:" at 12410,686.23 h45
  text "Detex Corp" at 7413,578.23 h75
  text ".PRINT_DATE" at 8865,567.23 h70
  text "D4" at 12475,561.23 h70
  text "105848" at 10350,556.23 h70
  text "302 Detex Dr" at 7413,470.23 h75
  text "FILE NAME:" at 8810,386.23 h45
  text "DWG NO:" at 10310,386.23 h45
  text "SCALE:" at 12410,386.23 h45
  text "New Braunfels, TX 78130" at 7413,362.23 h75
  text ".PCB_FILE_NAME_NO_PATH" at 8865,267.23 h70
  text "N/A" at 10360,266.23 h70
  text "1:1" at 12470,246.23 h70
  text "(830) 629-2900 x4379" at 7413,241.23 h75

## Dimensions
0,0 to 6500,0 on Drill Drawing
0,0 to 0,5700 on Drill Drawing

## Text inside footprints (layer, text, board x,y; h text height)
BR1: Top Overlay "+" at 5685,600 h60 r90; Top Overlay "-" at 5633,454 h60 r270
C1: Top Overlay "+" at 5222.44,553.42 h60 r270
JP1: Top Overlay "1" at 3832.75,3376 h50
K1: Top Overlay "+" at 3410,2160 h37.5 r180
K2: Top Overlay "+" at 2970,2157.35 h37.5 r180
K3: Top Overlay "+" at 5772,4425 h37.5 r90
K4: Top Overlay "+" at 5775,4981 h37.5 r90
P1: Top Overlay "RX<-" at 2120,180 h34; Top Overlay "RESET" at 520,1410 h34; Top Overlay "GND" at 2180,1670 h34; Top Overlay "AREF" at 2180,1770 h34; Top Overlay "SCL" at 2180,1870 h34; Top Overlay "A5" at 505,205 h34; Top Overlay "A4" at 505,305 h34; Top Overlay "A3" at 505,405 h34; Top Overlay "A2" at 505,505 h34; Top Overlay "A1" at 505,605 h34; Top Overlay "A0" at 505,705 h34; Top Overlay "8" at 2188.07,1060 h34; Top Overlay "7" at 2188.07,900 h34; Top Overlay "6" at 2188.07,800 h34; Top Overlay "5" at 2186.29,700 h34; Top Overlay "4" at 2186.29,605 h34; Top Overlay "2" at 2186.29,405 h34; Top Overlay "3" at 2188.07,510 h34; Top Overlay "10" at 2188.07,1270 h34; Top Overlay "9" at 2186.29,1165 h34; Top Overlay "11" at 2210.29,1365 h34; Top Overlay "12" at 2186.29,1460 h34; Top Overlay "13" at 2188.07,1560 h34; Top Overlay "SDA" at 2180,1970 h34; Top Overlay "VIN" at 520,905 h34; Top Overlay "IOREF" at 520,1505 h34; Top Overlay "3V3" at 520,1305 h34; Top Overlay "5V" at 525,1205 h34; Top Overlay "GND" at 520,1100 h34; Top Overlay "GND" at 520,1005 h34; Top Overlay "TX->" at 2120,280 h34
P2: Top Overlay "A0" at 1506.93,745.4 h30 r270; Top Overlay "Aref" at 1508,863 h27 r270.02; Top Overlay "Vin" at 1508,968 h30 r270; Top Overlay "GND" at 1506.93,1112.4 h30 r270; Top Overlay "5V" at 1506.93,1245.4 h30 r270; Top Overlay "3V" at 1506.93,1350.4 h30 r270; Top Overlay "13" at 1971.93,1557.57 h34 r270; Top Overlay "12" at 1971.93,1452.57 h34 r270; Top Overlay "11" at 1971.93,1346.91 h34 r270; Top Overlay "10" at 1971.93,1252.57 h34 r270; Top Overlay "9" at 1971.93,1138.41 h34 r270; Top Overlay "8" at 1971.93,1038.41 h34 r270; Top Overlay "7" at 1971.93,938.41 h34 r270; Top Overlay "6" at 1971.93,838.41 h34 r270; Top Overlay "5" at 1971.93,738.41 h34 r270; Top Overlay "4" at 1971.93,643.41 h34 r270; Top Overlay "3" at 1971.93,543.41 h34 r270; Top Overlay "2" at 1971.93,438.41 h34 r270; Top Overlay "1" at 1971.93,332.74 h34 r270; Top Overlay "0" at 1971.93,238.41 h34 r270; Top Overlay "A5" at 1506.93,250.4 h30 r270; Top Overlay "A4" at 1506.93,345.4 h30 r270; Top Overlay "A3" at 1506.93,445.4 h30 r270; Top Overlay "A2" at 1506.93,545.4 h30 r270; Top Overlay "A1" at 1506.93,639.74 h30 r270; Top Overlay "USB" at 1506.93,1572.4 h30 r270; Top Overlay "Rst" at 1506.93,1456.73 h30 r270; Mechanical 92 "D:/SmartProjects/Snc/a4_bn_logo2.bmp" at 1405.5,1728 h0.85 r270